# Altium PCB The-SIPM-(1).pcbdoc
Units mil, origin at the board's own origin, x right, y up, seen from the top; angles counter-clockwise.
Board outline 5890 x 5140 mil, 2 copper layers (Top Layer, Bottom Layer); 119 components, 59 nets, 365 pads, 99 vias.
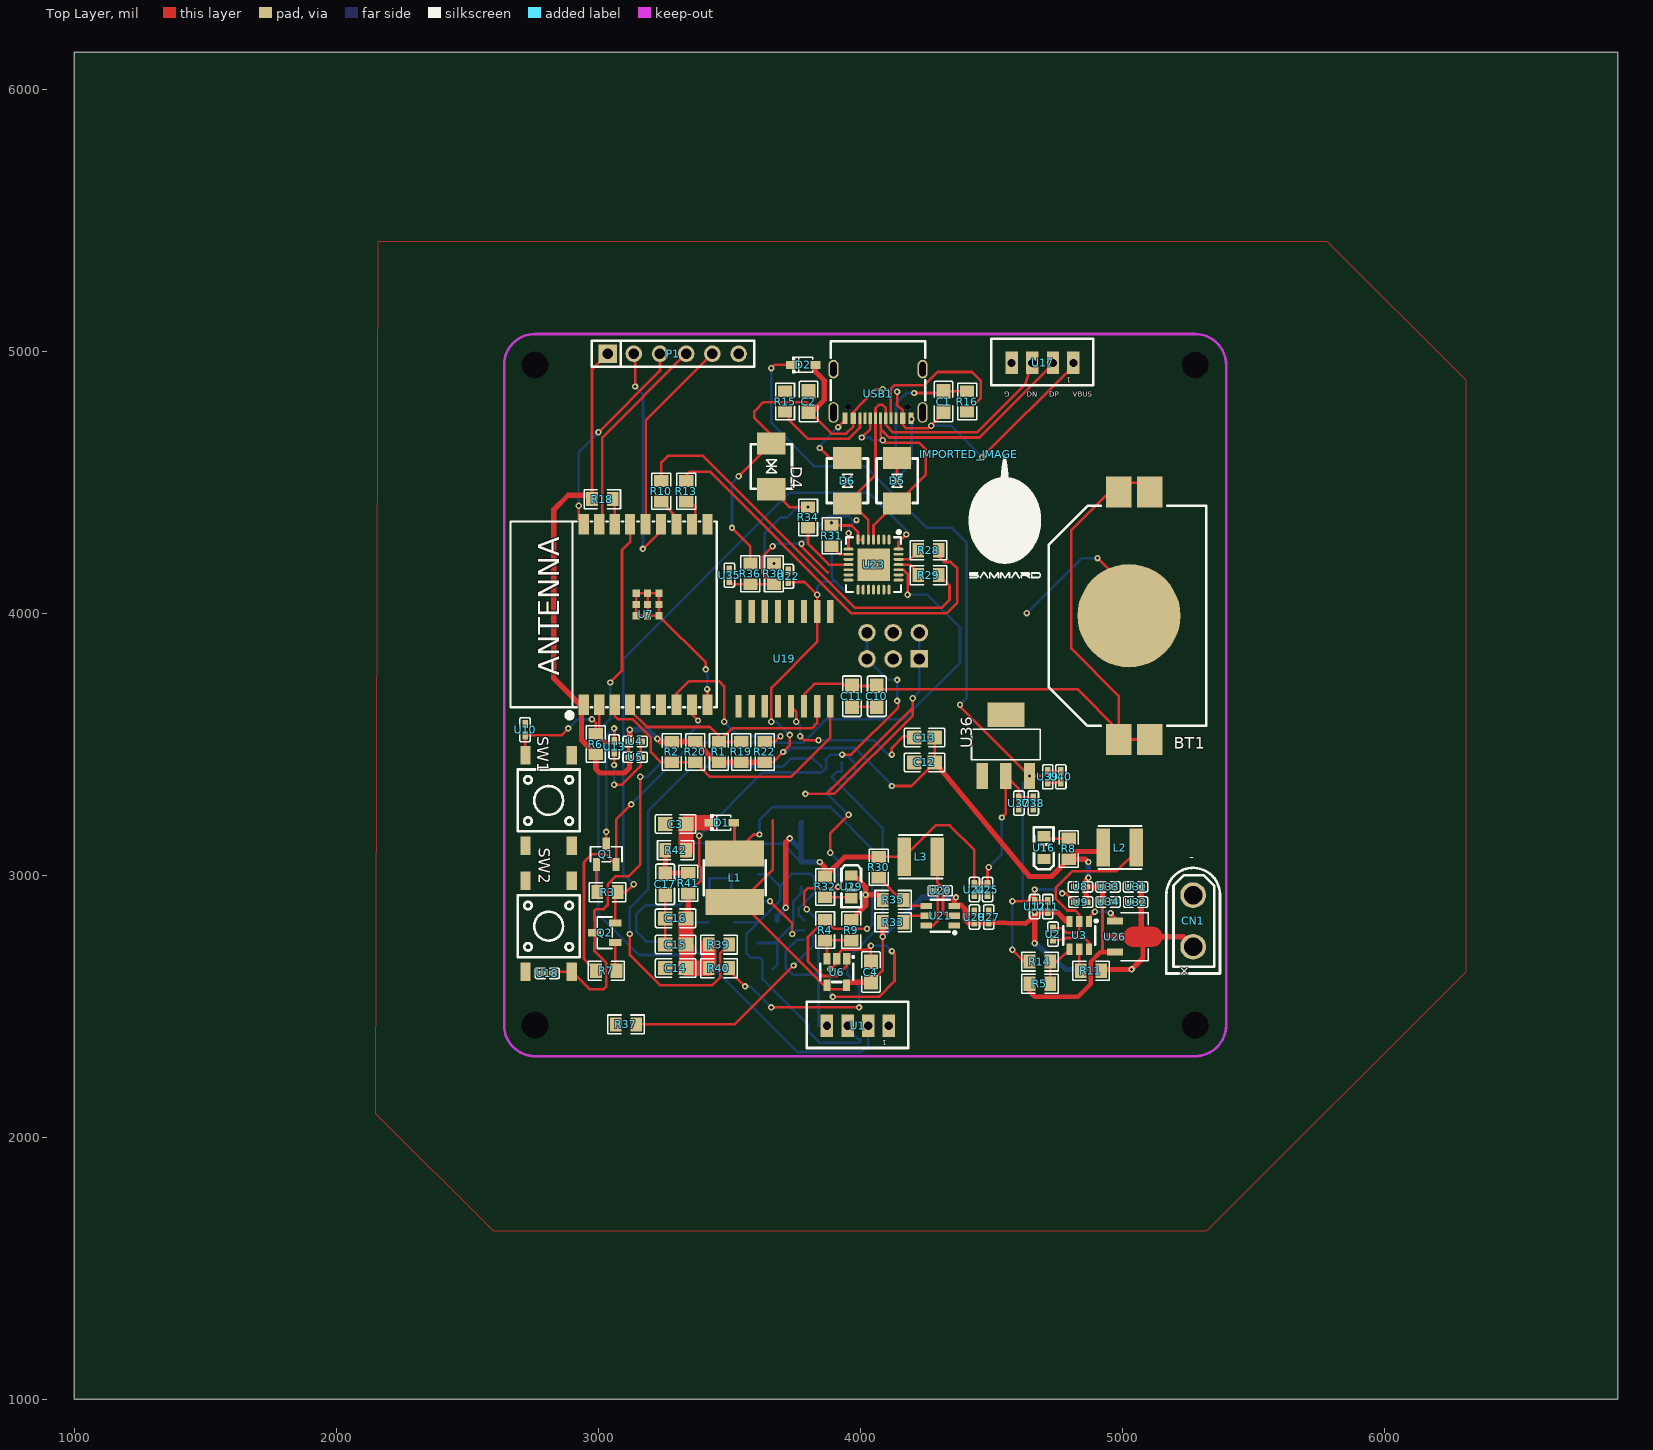
[diagram p0: Top Layer view]
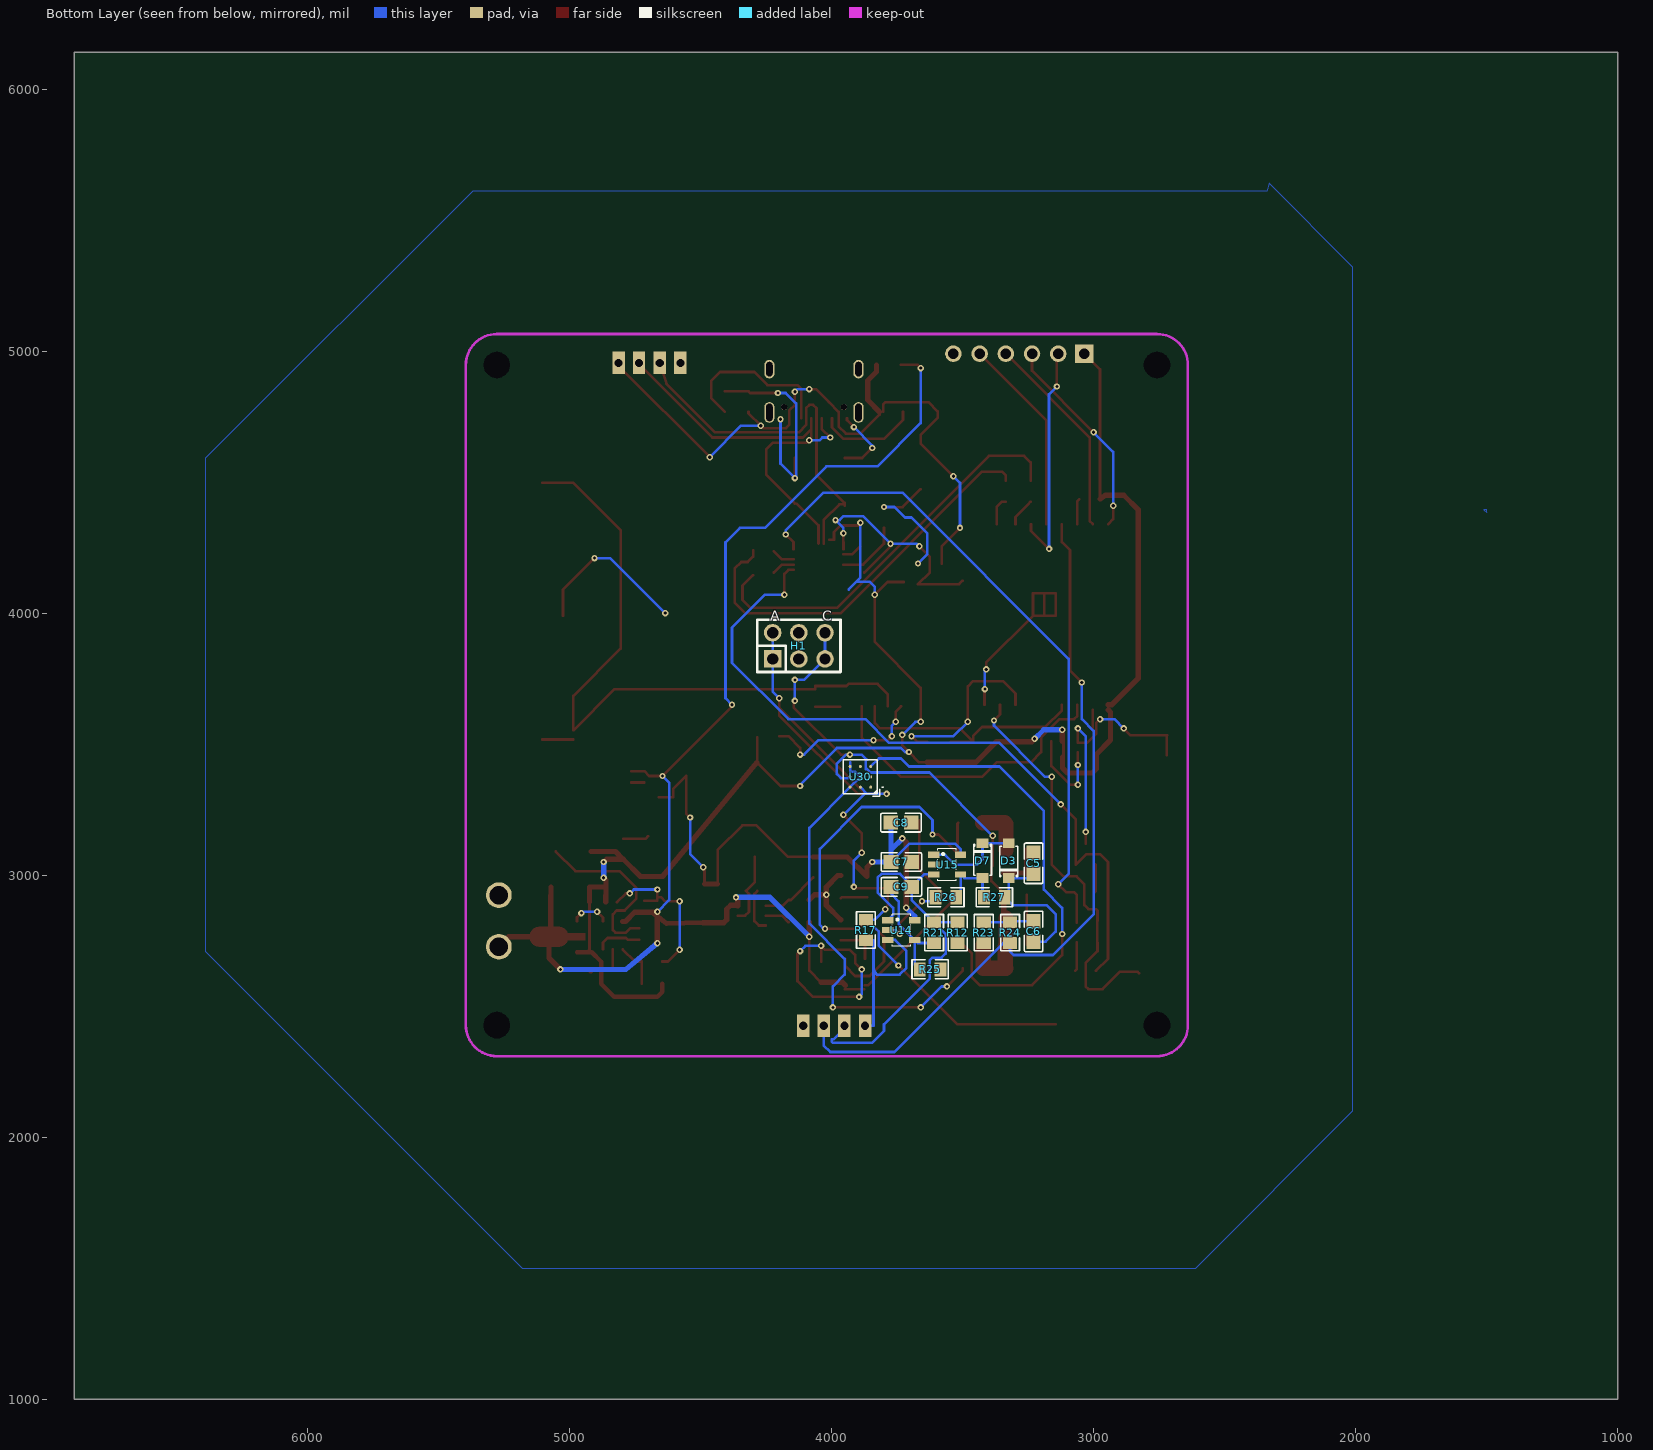
[diagram p1: Bottom Layer view, seen from below]

## Layer stack, top to bottom
Top Layer: signal copper (thickness not stored)
Dielectric: dielectric 12.6, FR-4, Dk 4.8
Bottom Layer: signal copper (thickness not stored)

## Board outline
6890,1000 1000,1000 1000,6140 6890,6140
cut-out: 2707.84,4946.89 cw(c2758.11,4947.16) 2808.39,4946.89 cw(c2758.11,4946.62) 2707.84,4946.89
cut-out: 2707.84,2427.21 cw(c2758.11,2427.48) 2808.39,2427.21 cw(c2758.11,2426.94) 2707.84,2427.21
cut-out: 5227.51,2427.21 cw(c5277.79,2427.48) 5328.06,2427.21 cw(c5277.79,2426.94) 5227.51,2427.21
cut-out: 5227.51,4946.89 cw(c5277.79,4947.16) 5328.06,4946.89 cw(c5277.79,4946.62) 5227.51,4946.89

## Components (designator, comment, footprint, x,y, rotation, side; value= is the part's Value field where it differs from the comment)
BT1 "CR2032" BAT-SMD_CR2032 5045,3990 r270 top
C1 "0.1uF" C0805#1 4317.25,4807.25 r90 top
C2 "10uF" C0805#1 3802.25,4807.25 r90 top
C3 "4.7uF" C0805#1 3295,3195 r180 top
C4 "2.2uF" C0805#1 4040,2630 r90 top
C5 "20nF" C0805#2 3228.89,3045.14 r270 bottom
C6 "20nF" C0805#2 3228.89,2785.14 r270 bottom
C7 "0.1uF" C0805#2 3733.89,3050.14 r0 bottom
C8 "10uF" C0805#2 3735,3200 r0 bottom
C9 "20nF" C0805#2 3733.89,2955.14 r0 bottom
C10 "0.1uF" C0805#1 4062.5,3682.5 r270 top
C11 "10uF" C0805#1 3967.5,3682.5 r270 top
C12 "0.1uF" C0805#1 4245,3430 r180 top
C13 "10uF" C0805#1 4245,3525 r180 top
C14 "0.1uF" C0805#1 3295,2645 r180 top
C15 "1uF" C0805#1 3295,2735 r180 top
C16 "10uF" C0805#1 3295,2835 r180 top
C17 "1uF" C0805#1 3255,2965 r270 top
CN1 "XT30UPB-M" CONN-TH_XT30UPB-M 5270,2825 r270 top
D1 "1N5819WS" SOD-323_L1.8-W1.3-LS2.5-RD 3470,3200 r0 top
D2 "LBAT54HT1G" SOD-323_L1.8-W1.3-LS2.5-RD 3782.25,4947.25 r0 top
D3 "1N5817W" SOD-123_L2.8-W1.8-LS3.7-RD 3323.89,3055.14 r270 bottom
D4 "SMBJ7.5CA-QH" DO-214AA_L4.4-W3.6-LS5.3-BI 3660,4560 r270 top
D5 "SMBJ7.5CA-QH" DO-214AA_L4.4-W3.6-LS5.3-BI 4140,4505 r90 top
D6 "SMBJ7.5CA-QH" DO-214AA_L4.4-W3.6-LS5.3-BI 3950,4505 r90 top
D7 "1N5817W" SOD-123_L2.8-W1.8-LS3.7-RD 3423.89,3055.14 r90 bottom
H1 "2×(4-1) Double female header" HDR-TH_6P-P2.54-V-F-R2-C3-S2.54-1 4125,3875 r0 bottom
IMPORTED_IMAGE "IMPORTED_IMAGE" IMPORTED_IMAGE 4413.43,4605.53 r0 top
L1 "10uH" IND-SMD_L6.0-W6.0_FNR60XXS 3520,2990 r270 top
L2 "2.2uH" IND-SMD_L4.0-W4.0_SMNR4012 4990,3105 r0 top
L3 "3.3uH" IND-SMD_L4.0-W4.0_SMNR4012 4230,3070 r0 top
P1 "SD card Reader" HDR-TH_6P-P2.54-V-F 3285,4990 r0 top
Q1 "L8050QLT1G" SOT-23-3_L2.9-W1.3-P1.90-LS2.4-BR 3030,3080 r270 top
Q2 "L8050QLT1G" SOT-23-3_L2.9-W1.3-P1.90-LS2.4-BR 3025,2780 r0 top
R1 "10k" R0805#1 3460,3470 r270 top
R2 "10k" R0805#1 3280,3470 r90 top
R3 "10K" R0805#1 3035,2935 r180 top
R4 "2k" R0805#1 3865,2790 r90 top
R5 "33.2k" R0805#1 4685,2585 r0 top
R6 "10K" R0805#1 2990,3500 r90 top
R7 "10K" R0805#1 3030,2635 r0 top
R8 "1k" R0805#1 4795,3100 r270 top
R9 "51k" R0805#1 3965,2790 r270 top
R10 "499" R0805#1 3240,4465 r90 top
R11 "10k" R0805#1 4880,2635 r0 top
R12 "0805" R0805#2 3518.89,2780.14 r90 bottom
R13 "499" R0805#1 3335,4465 r90 top
R14 "10k" R0805#1 4685,2670 r0 top
R15 "5.1k" R0805#1 3712.25,4807.25 r90 top
R16 "5.1k" R0805#1 4407.25,4807.25 r270 top
R17 "0805" R0805#2 3868.89,2790.14 r90 bottom
R18 "10k" R0805#1 3015,4435 r0 top
R19 "10K" R0805#1 3545,3470 r90 top
R20 "10K" R0805#1 3370,3470 r270 top
R21 "0805" R0805#2 3608.89,2780.14 r270 bottom
R22 "10k" R0805#1 3635,3470 r90 top
R23 "0805" R0805#2 3418.89,2780.14 r270 bottom
R24 "0805" R0805#2 3318.89,2780.14 r270 bottom
R25 "0805" R0805#2 3623.89,2640.14 r0 bottom
R26 "0805" R0805#2 3563.89,2915.14 r180 bottom
R27 "0805" R0805#2 3378.89,2915.14 r180 bottom
R28 "0Ω" R0805#1 4260,4240 r0 top
R29 "0Ω" R0805#1 4260,4145 r0 top
R30 "54.9k" R0805#1 4070,3030 r270 top
R31 "1k" R0805#1 3890,4295 r270 top
R32 "1k" R0805#1 3865,2955 r90 top
R33 "10k" R0805#1 4125,2820 r180 top
R34 "10k" R0805#1 3800,4365 r270 top
R35 "10k" R0805#1 4125,2905 r0 top
R36 "22.1K" R0805#1 3580,4150 r270 top
R37 "0805" R0805#1 3105,2430 r0 top
R38 "47.5K" R0805#1 3670,4150 r90 top
R39 "0Ω" R0805#1 3460,2735 r180 top
R40 "0Ω" R0805#1 3460,2645 r180 top
R41 "0805" R0805#1 3342.6,2968.91 r90 top
R42 "0805" R0805#1 3295,3095 r0 top
SW1 "SMD Tactile Switch6*6*6mm" SW-SMD_4P-L6.0-W6.0-P4.50-LS9.0_C23873 2810,3284.99 r270 top
SW2 "SMD Tactile Switch6*6*6mm" SW-SMD_4P-L6.0-W6.0-P4.50-LS9.0_C23873 2810,2804.99 r90 top
U1 "JST-PH_4-PIN_HEADER" JST_B4B-PH_HEADER 3990,2425 r0 top
U2 "0.1uF" C0402 4735,2775 r90 top
U3 "TPS563201DDCR" SOT-23-6_L2.9-W1.6-P0.95-LS2.8-BR 4835,2770 r90 top
U4 "10uF" C0402 3140,3510 r0 top
U5 "0.1uF" C0402 3140,3450 r0 top
U6 "MIC2288YD5-TR" TSOT-23-5_L2.9-W1.6-P0.95-LS2.8-BR 3910,2630 r90 top
U7 "ESP32-C3-WROOM-02-N4(4MB)" BULETM-SMD_ESPRESSIF_ESP32-C3-WROOM-02-N4-4MB 3180,3995 r90 top
U8 "22uF" C0402 4840,2955 r180 top
U9 "22uF" C0402 4840.59,2896.9 r180 top
U10 "0.1uF" C0402 2720,3555 r270 top
U11 "10uF" C0402 4715,2880 r90 top
U12 "1uF" C0402 4665,2880 r90 top
U13 "1uF" C0402 3060,3490 r270 top
U14 "OPA356AIDBVR" SOT-23-5_L3.0-W1.7-P0.95-LS2.8-BR 3733.89,2790.14 r180 bottom
U15 "OPA356AIDBVR" SOT-23-5_L3.0-W1.7-P0.95-LS2.8-BR 3558.89,3040.14 r180 bottom
U16 "0805 SF-RED" LED0805-RD_RED 4700,3105 r90 top
U17 "JST-PH_4-PIN_HEADER" JST_B4B-PH_HEADER 4695,4955 r0 top
U18 "0.1uF" C0402 2805,2625 r0 top
U19 "DS3231" SO16W 3710,3825 r180 top
U20 "0.1uF" C0402 4305,2940 r0 top
U21 "TPS563201DDCR" SOT-23-6_L2.9-W1.6-P0.95-LS2.8-BR 4305,2845 r0 top
U22 "10uF" C0402 3725,4140 r90 top
U23 "CP2102" QFN-28_L5.0-W5.0-P0.50-TL-EP3.2 4050,4185 r270 top
U24 "22uF" C0402 4435,2945 r270 top
U25 "22uF" C0402 4485,2945 r270 top
U26 "HT7833" SOT-89_L4.5-W2.5-P1.50-LS4.2-BR 5025,2765 r180 top
U27 "0.1uF" C0402 4490,2840 r90 top
U28 "10uF" C0402 4435,2840 r90 top
U29 "0805 SF-RED" LED0805-RD_RED 3965,2955 r270 top
U30 "Sipm2" SIPM_REVERSE 3890,3375 r270 bottom
U31 "10uF" C0402 5050,2955 r180 top
U32 "0.1uF" C0402 5050.59,2896.9 r180 top
U33 "10uF" C0402 4945,2955 r0 top
U34 "0.1uF" C0402 4945.59,2897.67 r0 top
U35 "1uF" C0402 3500,4145 r90 top
U36 "AMS117-5V" AMS117-TOPL 4555,3495 r90 top
U37 "0.1uF" C0402 4605,3275 r270 top
U38 "10uF" C0402 4660,3275 r270 top
U39 "10uF" C0402 4715,3375 r270 top
U40 "0.1uF" C0402 4765,3375 r270 top
USB1 "HX TYPE-C 16P 3MD 5A" TYPE-C-SMD_HX-TYPE-C-16P-3MD-5A 4067.25,4837.25 r180 top

## Footprints (in the part's own frame and the unit in brackets; to place one, negate y for a bottom-side part, rotate by r counter-clockwise, add the part's x,y. Pads: shape width x height; smd on the part's side, far side on the other; paste and mask are expansions set on the pad)
AMS117-TOPL [mm]
  rect 2.5x1.1 smd paste+0 mask+0.051: 1(-2.97,2.3) 2(-2.97,0) 3(-2.97,-2.3)
  rect 2.34x3.6 smd paste+0 mask+0.051: 4(2.97,0)
  silkscreen extent -1.37,-3.33 1.57,3.33
BAT-SMD_CR2032 [mm]
  round 10 smd paste-100 mask+0.05: 1(0,-0.508)
  rect 3x2.5 smd paste-100 mask+0.05: 2(-12,-1.5) 2(-12,1.5) 2(12,-1.5) 2(12,1.5)
  silkscreen extent -10.68,-8.3 10.68,7
BULETM-SMD_ESPRESSIF_ESP32-C3-WROOM-02-N4-4MB [mm]
  rect 2x1 smd paste+0 mask+0.05: 1(-8.75,6) 2(-8.75,4.5) 3(-8.75,3) 4(-8.75,1.5) 5(-8.75,0) 6(-8.75,-1.5) 7(-8.75,-3) 8(-8.75,-4.5) 9(-8.75,-6) 10(8.75,-6) 11(8.75,-4.5) 12(8.75,-3) 13(8.75,-1.5) 14(8.75,0) 15(8.75,1.5) 16(8.75,3) 17(8.75,4.5) 18(8.75,6)
  rect 0.7x0.7 smd paste+0 mask+0.05: 19(-0.14,0.9) 19(-0.14,-0.2) 19(-0.14,-1.3) 19(0.96,-1.3) 19(0.96,-0.2) 19(0.96,0.9) 19(2.06,-1.3) 19(2.06,-0.2) 19(2.06,0.9)
  silkscreen extent -10.03,-6.9 9,13.1
C0402 [mm]
  rect 0.79x0.54 smd paste-100 mask+0.051: 1(-0.545,0) 2(0.545,0)
  silkscreen extent -1.17,-0.5 1.17,0.5
C0805#1 [mm]
  rect 1.41x1.35 smd paste-100 mask+0.051: 1(-1,0) 2(1,0)
  silkscreen extent -1.96,-0.9 1.96,0.9
C0805#2 [mm]
  rect 1.41x1.35 smd paste-100 mask+0.051: 1(1,0) 2(-1,0)
  silkscreen extent -1.96,-0.9 1.96,0.9
CONN-TH_XT30UPB-M [mm]
  round 2.5 hole 1.8 paste+0 mask+0.051: 1(-2.5,0) 2(2.5,0)
  silkscreen extent -5.14,-2.6 5.1,2.6
DO-214AA_L4.4-W3.6-LS5.3-BI [mil]
  rect 85x108 smd paste+0 mask+2: 1(-87,0) 2(87,0)
  silkscreen extent -85,-79 85,79
HDR-TH_6P-P2.54-V-F [mm]
  rect 1.8x1.8 hole 1.02 paste+0 mask+0.051: 1(-6.35,0)
  round 1.6 hole 1.02 paste+0 mask+0.051: 2(-3.81,0) 3(-1.27,0) 4(1.27,0) 5(3.81,0) 6(6.35,0)
  silkscreen extent -7.87,-1.25 7.87,1.25
HDR-TH_6P-P2.54-V-F-R2-C3-S2.54-1 [mm]
  rect 1.7x1.7 hole 1.1 paste+0 mask+0.051: 1(2.54,1.27)
  round 1.7 hole 1.1 paste+0 mask+0.051: 2(2.54,-1.27) 3(0,1.27) 4(0,-1.27) 5(-2.54,1.27) 6(-2.54,-1.27)
  silkscreen extent -4.04,-2.54 4.04,2.54
IMPORTED_IMAGE [mil]
  silkscreen extent 0,-472 276,0
IND-SMD_L4.0-W4.0_SMNR4012 [mm]
  rect 1.3x3.7 smd paste+0 mask+0.051: 1(-1.6,0) 2(1.6,0)
  silkscreen extent -2.08,-2.09 2.12,2.11
IND-SMD_L6.0-W6.0_FNR60XXS [mm]
  rect 2.5x5.7 smd paste+0 mask+0.051: 1(-2.35,-0.013) 2(2.35,0.013)
  silkscreen extent -1.69,-3 1.69,3
JST_B4B-PH_HEADER [mil]
  rect 47.2x85 hole 31.4 paste+0 mask+2: P1(118,0) P2(40,0) P3(-39,0) P4(-118,0)
  silkscreen extent -195,-85 193,92
LED0805-RD_RED [mm]
  rect 1x1.25 smd paste+0 mask+0.051: 1(-1.1,0) 2(1.1,0)
  silkscreen extent -2.1,-0.95 1.98,0.96
QFN-28_L5.0-W5.0-P0.50-TL-EP3.2 [mm]
  oval 0.95x0.28 smd paste-100 mask+0.051: 1(-2.425,1.501) 2(-2.425,1.001) 3(-2.425,0.501) 4(-2.425,0) 5(-2.425,-0.5) 6(-2.425,-1.001) 7(-2.425,-1.501) 15(2.425,-1.501) 16(2.425,-1.001) 17(2.425,-0.5) 18(2.425,0) 19(2.425,0.501) 20(2.425,1.001) 21(2.425,1.501)
  oval 0.28x0.95 smd paste-100 mask+0.051: 8(-1.501,-2.425) 9(-1.001,-2.425) 10(-0.501,-2.425) 11(0,-2.425) 12(0.5,-2.425) 13(1.001,-2.425) 14(1.501,-2.425) 22(1.501,2.425) 23(1.001,2.425) 24(0.5,2.425) 25(0,2.425) 26(-0.501,2.425) 27(-1.001,2.425) 28(-1.501,2.425)
  rect 3.15x3.15 smd paste-100 mask+0.051: 29(0,0)
  silkscreen extent -3.3,-2.65 2.65,2.65
R0805#1 [mil]
  rect 44.59x54.21 smd paste-3937.01 mask+2: 1(-39.37,0) 2(39.37,0)
  silkscreen extent -69,-36 69,36
R0805#2 [mil]
  rect 44.59x54.21 smd paste-3937.01 mask+2: 1(39.37,0) 2(-39.37,0)
  silkscreen extent -69,-36 69,36
SIPM_REVERSE [mm]
  round 0.288 smd paste-100 mask+0.051: A1(-1,0) A2(1,0) C1(0,-1) C2(0,1) R1(-1,1) R2(1,1) ""(-1,-1) ""(0,0) ""(1,-1)
  silkscreen extent -1.65,-1.65 1.87,2.2
SO16W [mil]
  rect 23.6x86.6 smd paste+0 mask+2: 1(-175,-181) 2(-125,-181) 3(-75,-181) 4(-25,-181) 5(25,-181) 6(75,-181) 7(125,-181) 8(175,-181) 9(175,181) 10(125,181) 11(75,181) 12(25,181) 13(-25,181) 14(-75,181) 15(-125,181) 16(-175,181)
SOD-123_L2.8-W1.8-LS3.7-RD [mm]
  rect 0.95x1.15 smd paste+0 mask+0.051: 1(1.693,0) 2(-1.693,0)
  silkscreen extent -1.41,-0.87 1.58,0.87
SOD-323_L1.8-W1.3-LS2.5-RD [mm]
  rect 1x0.75 smd paste+0 mask+0.051: 1(-1.173,0) 2(1.173,0)
  silkscreen extent -1.08,-0.8 0.9,0.8
SOT-23-3_L2.9-W1.3-P1.90-LS2.4-BR [mm]
  rect 1.25x0.7 smd paste+0 mask+0.051: 1(1,-0.95) 2(1,0.95) 3(-1,0)
  silkscreen extent -0.73,-1.53 0.73,1.53
SOT-23-5_L3.0-W1.7-P0.95-LS2.8-BR [mm]
  rect 1.1x0.6 smd paste+0 mask+0.051: 1(-1.3,0.95) 2(-1.3,0) 3(-1.3,-0.95) 4(1.3,-0.95) 5(1.3,0.95)
  silkscreen extent -0.9,-1.55 0.9,1.55
SOT-23-6_L2.9-W1.6-P0.95-LS2.8-BR [mm]
  rect 1.1x0.6 smd paste+0 mask+0.051: 1(1.35,-0.95) 2(1.35,0) 3(1.35,0.95) 4(-1.35,0.95) 5(-1.35,0) 6(-1.35,-0.95)
  silkscreen extent -0.9,-1.78 1.52,1.55
SOT-89_L4.5-W2.5-P1.50-LS4.2-BR [mm]
  rect 1.575x0.672 smd paste+0 mask+0.051: 1(1.356,-1.5) 3(1.356,1.5)
  Top Layer region: -2.283,0.959 -0.429,0.959 -0.385,0.958 -0.34,0.955 -0.296,0.949 -0.252,0.942 -0.208,0.933 -0.165,0.921 -0.123,0.908 -0.081,0.893 -0.04,0.875 0,0.856 0.04,0.835 0.078,0.812 0.115,0.788 0.151,0.761 0.185,0.733 0.219,0.704 0.251,0.673 0.281,0.64 0.31,0.606 0.337,0.571 0.362,0.534 0.386,0.497 0.408,0.458 0.428,0.418 0.447,0.339 2.144,0.339 2.144,-0.321 0.447,-0.321 0.428,-0.401 0.408,-0.44 0.386,-0.479 0.362,-0.517 0.337,-0.553 0.31,-0.588 0.281,-0.622 0.251,-0.655 0.219,-0.686 0.185,-0.716 0.151,-0.744 0.115,-0.77 0.078,-0.795 0.04,-0.818 0,-0.839 -0.04,-0.858 -0.081,-0.875 -0.123,-0.89 -0.165,-0.904 -0.208,-0.915 -0.252,-0.925 -0.296,-0.932 -0.34,-0.937 -0.385,-0.94 -0.429,-0.941 -2.283,-0.941 -2.328,-0.94 -2.372,-0.937 -2.416,-0.932 -2.46,-0.925 -2.504,-0.915 -2.547,-0.904 -2.589,-0.89 -2.631,-0.875 -2.672,-0.858 -2.713,-0.839 -2.752,-0.818 -2.79,-0.795 -2.827,-0.77 -2.863,-0.744 -2.898,-0.716 -2.931,-0.686 -2.963,-0.655 -2.993,-0.622 -3.022,-0.588 -3.049,-0.553 -3.075,-0.517 -3.098,-0.479 -3.12,-0.44 -3.141,-0.401 -3.159,-0.36 -3.175,-0.318 -3.189,-0.276 -3.202,-0.233 -3.212,-0.19 -3.22,-0.146 -3.227,-0.102 -3.231,-0.058 -3.233,-0.013 -3.233,0.031 -3.231,0.076 -3.227,0.12 -3.22,0.164 -3.212,0.208 -3.202,0.251 -3.189,0.294 -3.175,0.336 -3.159,0.377 -3.141,0.418 -3.12,0.458 -3.098,0.497 -3.075,0.534 -3.049,0.571 -3.022,0.606 -2.993,0.64 -2.963,0.673 -2.931,0.704 -2.898,0.733 -2.863,0.761 -2.827,0.788 -2.79,0.812 -2.752,0.835 -2.713,0.856 -2.672,0.875 -2.631,0.893 -2.589,0.908 -2.547,0.921 -2.504,0.933 -2.46,0.942 -2.416,0.949 -2.372,0.955 -2.328,0.958
  silkscreen extent -1.87,-2.33 0.78,2.33
SW-SMD_4P-L6.0-W6.0-P4.50-LS9.0_C23873 [mm]
  rect 1.8x1 smd paste+0 mask+0.051: 1(-4.4,2.25) 2(4.4,2.25) 3(4.4,-2.25) 4(-4.4,-2.25)
  silkscreen extent -3,-3 3,3
TSOT-23-5_L2.9-W1.6-P0.95-LS2.8-BR [mm]
  rect 1.1x0.7 smd paste+0 mask+0.051: 1(1.294,-0.951) 2(1.294,-0.001) 3(1.294,0.951) 4(-1.294,0.951) 5(-1.294,-0.949)
  silkscreen extent -0.97,-1.65 1.52,1.61
TYPE-C-SMD_HX-TYPE-C-16P-3MD-5A [mm]
  oval 1x1.8 hole 0.6 slot 1.4 at 90 deg paste+0 mask+0.051: 1(-4.32,-2.384) 1(4.32,-2.384)
  oval 1x2 hole 0.6 slot 1.7 at 90 deg paste+0 mask+0.051: 1(-4.32,1.816) 1(4.32,1.816)
  rect 0.5x1.14 smd paste-100 mask+0.051: A1(-3.2,2.383) A4(-2.4,2.383) A9(2.4,2.383) A12(3.2,2.383)
  rect 0.3x1.14 smd paste-100 mask+0.051: A5(-1.25,2.383) A6(-0.25,2.383) A7(0.25,2.383) A8(1.25,2.384) B5(1.75,2.383) B6(0.75,2.383) B7(-0.75,2.383) B8(-1.75,2.384)
  round 0.6 hole 0.6 unplated paste+0: ""(-2.89,1.296) ""(2.89,1.296)
  silkscreen extent -4.57,-5.08 4.57,0.63

## Via types
v1: diameter 24.41, hole 12.2, Top Layer to Bottom Layer, tented both sides, 99 vias

## Nets (pads, with @x,y where several pads share a name; then routed paths per layer and width w, separated by ;. In a path a pad name is that pad's centre, name@x,y a point inside that pad or via, vN(x,y) a via of type N, cw(c..) or ccw(c..) an arc to the next point about the centre after c; other vN are vias at no path point)
3V3: C12.1 C13.1 L2.1 P1.1 R1.2 R2.2 R5.1 R6.1 R8.2 R18.1 R19.1 R20.1 R22.1 R31.1 U4.1 U5.1 U7.1 U8.1 U9.1 U19.2 U22.1 U23.6 U23.7 U26.3 U33.1 U34.1 | length 6911.6
  Top Layer w10: R18.1 2975.63,4930.63 P1.1 ; U5.1@3115,3455 U4.1@3115,3515 ; R22.1 3665.63,3430.63 v1(3705,3470) 3730,3495 v1(3730,3535) ; v1(3660,3585) 3660,3655 3660,3715 3835,3890 U19.2 v1(3835,4070) 3786.46,4118.54 U22.1 ; R31.1 3965.6,4334.4 3990.9,4309.1 U23.7 ; U23.7@3990,4280 U23.6@4007.8,4280 ; v1(4120,3340) 4194.38,3340 C12.1 C13.1 ; U34.1 4924.1,2715.9 4934.1,2705.9 U26.3
  Top Layer w17: R5.1 4645.63,2554.37 4665,2535 4830,2535 4880,2585 4880,2670 4915.94,2705.94 U26.3
  Top Layer w20: U7.1@2943.78,3630.51 2935,3621.73 2935,3515.63 R6.1 ; U7.1 2929.5,3650.5 2830,3750 2830,4395 2885,4450 2955,4450 R18.1 ; R6.1 2990,3405 3005,3390 3100,3390 3118.5,3408.5 U5.1 ; U4.1 3120,3511.46 v1(3120,3555) ; v1(3225,3520) 3235.63,3509.37 R2.2 R20.1 3448.74,3430.63 R1.2 R19.1 R22.1 ; C12.1 4644.4,2995 4730,2995 R8.2 ; U9.1@4862.05,2896.9 U8.1 ; v1(4870,2990) 4861.46,2981.46 U8.1 ; v1(4870,3050) 4859.37,3060.63 R8.2 4824.37,3090 L2.1@4916.9,3090 ; U34.1 U33.1 U8.1
  Bottom Layer w10: v1(3660,3585) 3680,3585 v1(3730,3535) ; v1@3710,3470 3720,3470 3735,3485 3980,3485 v1@4125,3340 ; v1(3835,4070) 3835,4100 3855,4120 3905,4120 3935,4090 3890,4135 v1(3890,4345)
  Bottom Layer w20: v1(3120,3555) 3190,3555 v1(3225,3520) ; v1(4870,2990) v1(4870,3050)
5V: C7.1 C8.1 L3.1 R30.1 R32.2 U14.5 U15.5 U24.1 U25.1 U36.2 U37.1 U38.1 | length 2517.3
  Top Layer w10: R30.1 L3.1 4287.01,3190 4340,3190 4435,3095 U24.1 ; U25.1 4485,3025 v1(4490,3030) ; v1(4540,3220) 4555,3235 U36.2 4605,3328.07 U37.1 U38.1
  Top Layer w20: v1(3715,2875) 3715,3125 v1(3730,3140) ; v1(3845,3050.14) 3865,3030.14 R32.2 3940,3069.37 R30.1 ; U24.1 U25.1
  Bottom Layer w10: U15.5 3507.7,3099 3528.9,3120.1 3703.3,3120.1 C7.1 ; v1(4490,3030) 4540,3080 v1(4540,3220)
  Bottom Layer w20: U14.5 3682.71,2842.71 v1(3715,2875) ; v1(3730,3140) 3773.27,3096.73 C7.1 ; C8.1 3773.26,3198.89 C7.1 ; v1(3845,3050.14) C7.1
33V: C3.1 D1.1 R42.2 | length 191.5
  Top Layer w59.05: R42.2 C3.1 ; C3.1 3339.4,3200 3384.6,3200 3386.9,3200 D1.1
C6_2: C6.2 R23.2 R24.2 | length 192.1
  Bottom Layer w10: C6.2 3313.89,2824.51 R24.2 R23.2
CHIP_PU: Q1.3 R6.2 SW1.4 U7.2 U10.2 U13.1 | length 1117
  Top Layer w10: SW1.4 2721.41,3532.12 U10.2 2858.54,3533.54 v1(2885,3560) ; v1(2975,3595) 2990,3580 R6.2 3002.83,3552.2 U7.2@3002.83,3630.51 ; R6.2 3024.4,3505 3060,3505 U13.1@3060,3521.5 ; Q1.3 v1(3030,3165) ; U13.1 v1(3060,3560)
  Bottom Layer w10: v1(2885,3560) 2920,3595 v1(2975,3595) ; v1(3030,3165) 3030,3530 v1(3060,3560)
CLK: P1.4 U7.17 | length 788.1
  Top Layer w10: U7.17 3015,4351.7 3015,4670 P1.4
CS: P1.2 U7.13 | length 882.6
  Top Layer w10: P1.2 3140,4985 v1(3140,4865) ; v1(3170,4245) 3239.05,4314.05 U7.13@3239.05,4339.49
  Bottom Layer w10: v1(3140,4865) 3170,4835 v1(3170,4245)
D3_1: C5.1 C6.1 D3.1 R27.1 | length 569.9
  Bottom Layer w10: C6.1 3183.3,2745.8 3145,2784 3145,2851.2 3178.9,2885.1 3309.5,2885.1 R27.1 ; C5.1 3246.16,2988.51 D3.1 3323.89,2930.77 R27.1
DTR: Q2.2 R3.1 U23.28 | length 2557.6
  Top Layer w10: Q2.2 3064.37,2925 R3.1 3105,2935 v1(3135,2965) ; U23.28 4145.47,4270.47 v1(4175,4300)
  Bottom Layer w10: v1(3135,2965) 3095,3005 3095,3825 3730,4460 4030,4460 4175,4315 v1(4175,4300)
GND: BT1.1 C1.2 C2.2 C3.2 C4.2 C5.2 C7.2 C8.2 C10.2 C11.2 C12.2 C13.2 C14.2 C15.2 C16.2 C17.2 CN1.1 D4.2 D5.2 D6.2 H1.3 H1.4 P1.6 R9.1 R12.2 R14.1 R15.2 R16.1 R23.1 R25.2 R26.2 R34.1 R35.1 R37.1 R38.2 SW1.1 SW2.1 U1.P1 U3.1 U4.2 U5.2 U6.2 U7.9 U7.19 U8.2 U9.2 U10.1 U11.2 U12.2 U13.2 U14.2 U15.2 U16.1 U17.P4 U18.1 U19.13 U21.1 U22.2 U23.3 U24.2 U25.2 U26.1 U27.2 U28.2 U29.1 U31.2 U32.2 U33.2 U34.2 U35.2 U36.1 U37.2 U38.2 U39.2 U40.2 USB1.A1 USB1.A12 | length 6890.3
  Top Layer w10: v1(3060,3345) 3090,3345 3161.46,3416.46 U5.2 U4.2 ; v1(3060,3420) U13.2 ; C17.2 C16.2 ; C15.2 C16.2 ; v1(3410,3785) 3410,3810.67 U7.19@3231.18,3989.49 ; v1(3415,3710) 3416.22,3708.78 U7.9 ; v1(3655,2900) 3740,2815 v1(3740,2775) ; D4.2 3728.63,4404.37 R34.1 ; U19.13 3755,3624 v1(3755,3585) ; v1(3770,3530) 3785,3515 v1(3840,3515) ; v1(3845,4630) 3883,4592 D6.2 ; v1(3885,2640) 3910.04,2665.04 U6.2 3910.04,2695.04 3930,2715 4025,2715 v1(4040,2730) C4.2 ; v1(3895,2535) 4070,2535 4130,2595 4130,2700 v1(4120,2710) ; v1(3915,4710) 3941.27,4736.27 USB1.A12 ; C11.2 C10.2 ; v1(4120,3460) 4120,3485 4165,3530 C13.2@4200.3,3530 ; v1(4140,4515) D5.2 ; v1(4205,4840) 4310.63,4840 C1.2 R16.1@4407.25,4846.62 ; v1(4580,2715) 4625,2670 R14.1 ; v1(4580,2900) 4635,2900 4650,2915 4665,2915 U12.2 ; v1(4665,2945) U12.2 U11.2 ; U39.2 U40.2 ; v1(4770,2930) 4785,2930 4818.1,2896.9 U9.2 ; U3.1@4872.4,2823.15 4872.4,2837.4 v1(4895,2860) ; v1(4905,4210) 5025.01,4089.99 BT1.1 ; v1(4955,2855) 4971.6,2838.4 U26.1 ; U7.19@3187.87,3989.49 U7.19@3231.18,3989.49 ; U7.19@3187.87,3989.49 3187.87,4032.79 U7.19@3187.87,4076.1 ; U7.19@3187.87,3989.49 3144.56,3989.49 3144.56,4032.79 3144.56,4076.1 U7.19@3187.87,4076.1 ; U7.19@3187.87,4076.1 3231.18,4076.1 3231.18,4032.79 U7.19@3231.18,3989.49
  Top Layer w20: R9.1 4020,2884.37 v1(4020,2925) ; U29.1 3976.69,2998.31 4020,2955 v1(4020,2925) ; R35.1 4065.63,2925 v1(4020,2925)
  Bottom Layer w10: v1(3060,3345) v1(3060,3420) ; v1(3410,3785) 3415,3780 v1(3415,3710) ; R26.2 3618.41,2900 v1(3655,2900) ; v1(3740,2775) 3755.14,2790.14 U14.2 ; v1(3755,3585) 3770,3570 v1(3770,3530) ; v1(3800,4405) 3760,4405 3720,4365 3695,4365 ; v1(3840,3515) 4050,3515 4105,3460 v1(4120,3460) ; v1(3845,4630) 3845,4640 v1(3915,4710) ; v1(3885,2640) 3885,2545 v1(3895,2535) ; v1(4040,2730) 4100,2730 v1(4120,2710) ; v1(4195,4740) 4195,4570 v1(4140,4515) 4135,4515 4135,4800 4175,4840 v1(4205,4840) ; v1(4580,2715) v1(4580,2900) ; v1(4635,4000) 4845,4210 v1(4905,4210) ; v1(4665,2945) 4755,2945 v1(4770,2930) ; v1(4895,2860) 4950,2860 v1(4955,2855) ; 3635,4224.4 v1(3670,4189.37) 3635,4224.4 ; 3635,4224.4 3635,4305 ; 3635,4224.4 3635,4305 ; 3635,4305 3695,4365 ; 3635,4305 3695,4365
GPIO2: R18.2 U7.16 | length 98.6
  Top Layer w10: R18.2 3061.89,4427.48 U7.16
GPIO8: R22.2 U7.7 | length 693.5
  Top Layer w10: U7.7 3298.11,3693.11 3345,3740 3460,3740 3480,3720 v1(3480,3585) ; R22.2 3674.37,3509.37 v1(3695,3530)
  Bottom Layer w10: v1(3480,3585) 3535,3530 v1(3695,3530)
GPIO9: Q2.3 SW2.4 U7.8 U18.2 | length 1566.9
  Top Layer w10: U18.2 2833.23,2631.77 SW2.4 2965.36,2565 3020,2565 3030,2575 3030,2665 2985,2710 Q2.3 2985,2865 2990,2870 3020,2870 3035,2885 3035,2965 3065,2995 3115,2995 3160,3040 v1(3160,3375) ; U7.8 3357.16,3612.84 v1(3380,3590)
  Bottom Layer w10: v1(3160,3375) 3185,3375 3380,3570 v1(3380,3590)
IN: R24.1 U1.P2 U7.15 | length 2929
  Top Layer w10: v1(3045,3735) 3090,3780 3090,4240 3120.94,4270.94 U7.15
  Bottom Layer w10: v1(3045,3735) 3045,3595 3000,3550 3000,2850 3155,2695 3305,2695 3318.9,2708.9 R24.1 3344.2,2740.8 3760,2325 4005,2325 4030,2350 U1.P2
MISO: P1.5 U7.14 | length 756.1
  Top Layer w10: U7.14 3180,4735 P1.5
MOSI: P1.3 U7.18 | length 786.7
  Top Layer w10: v1(2925,4410) 2925,4358.27 U7.18 ; v1(3000,4690) 3235,4925 P1.3
  Bottom Layer w10: v1(2925,4410) 2925,4615 v1(3000,4690)
Q1_1: Q1.1 R3.2 | length 106.9
  Top Layer w10: Q1.1 2992.6,2938.03 R3.2
Q2_1: Q2.1 R7.2 | length 109.7
  Top Layer w10: Q2.1 3064.37,2640 R7.2
R1: R39.1 U30.R1 | length 1879.4
  Top Layer w10: v1(3120,2775) 3120,2695 3235,2580 3435,2580 3465,2610 3465,2700.63 R39.1
  Bottom Layer w10: v1(3120,2775) 3120,2875 3190,2945 3190,3245 3359.4,3414.4 3704.4,3414.4 3735,3445 3820,3445 U30.R1
R3: R40.1 U30. | length 1681.9
  Top Layer w10: R40.1 3499.37,2635.63 v1(3560,2575) ; v1(3660,2495) v1(3995,2495)
  Bottom Layer w10: v1(3560,2575) 3580,2575 v1(3660,2495) ; 3929.4,3430.6 3929.4,3395 3910,3395 3890,3375 3929.37,3335.63 4085,3180 4085,2815 3950,2680 3950,2620 3995,2575 v1(3995,2495)
R8_1: R8.1 U16.2 | length 98.7
  Top Layer w10: U16.2 4708.94,3139.37 R8.1
R30_2: R30.2 R35.2 U21.4 | length 226.7
  Top Layer w10: R30.2 4155.63,2905 R35.2 4186.97,2882.4 U21.4@4251.85,2882.4
R32_1: R32.1 U29.2 | length 101.6
  Top Layer w10: R32.1 3961.06,2915.63 U29.2
R33_1: R33.1 U21.5 | length 97.8
  Top Layer w10: R33.1 4189.37,2845 U21.5@4251.85,2845
R41_2: C17.1 R41.2 R42.1 | length 179.9
  Top Layer w20: R42.1 C17.1 3258.91,3008.28 R41.2
RTS: Q1.2 R7.1 U23.24 | length 2824.6
  Top Layer w10: R7.1 2945,2680.63 2945,3050 2975,3080 3028.03,3080 Q1.2 3067.4,3212.4 v1(3125,3270) ; U23.24 4164.7,4165.3 4180,4150 v1(4180,4070)
  Bottom Layer w10: v1(3125,3270) 3360,3505 3780,3505 3870,3595 4165,3595 4380,3810 4380,3945 4255,4070 v1(4180,4070)
RX_UB: R13.2 R28.2 | length 1561.3
  Top Layer w10: R13.2@3335,4520 R13.2 3335,4525 3350,4540 3425,4540 3965,4000 4330,4000 4370,4040 4370,4169.4 4344.4,4195 4320,4195 4299.37,4215.63 R28.2
SCL: R2.1 R20.2 U7.3 U19.16 | length 1175.4
  Top Layer w10: U7.3 3061.9,3608.1 3075,3595 3130,3595 3200,3525 3200,3470 3239.4,3430.6 R2.1 ; R2.1 R20.2 ; R20.2 3425.6,3375 3735,3375 3885,3525 U19.16
SDA: R1.1 R19.2 U7.4 U19.15 | length 975.4
  Top Layer w10: U7.4 3120.9,3629.1 3185,3565 3425,3565 3460,3530 R1.1 3510.6,3560 3815,3560 3835,3580 U19.15 ; R1.1 R19.2
SIPM_A: H1.1 H1.2 R17.1 R37.2 U30.A2 | length 3413.9
  Top Layer w10: R37.2 3520,2430 v1(3745,2655) ; 3785,2905 3785,2935 ; v1(3790,3310) 3900,3310 4200,3610 v1(4200,3675) 4200,3640 3870,3310 3830,3310 ; v1(3795,2870) 3795,2875 3785,2885 3785,2935 ; v1(3885,3085) 3885,3160 v1(3955,3230) ; 3785,2935 3800,2950 ; 3785,2935 3800,2950 ; 3800,2950 v1@3910,2950 ; 3800,2950 v1@3910,2950 ; v1@3910,2950 v1(3915,2955) v1@3910,2950
  Bottom Layer w10: v1(3745,2655) 3820,2730 3820,2785 R17.1 3835.48,2829.52 v1(3795,2870) ; v1(3885,3085) 3915,3055 v1(3915,2955) ; U30.A2 3864.37,3310 v1(3790,3310) 3875,3310 v1(3955,3230) ; v1(4200,3675) 4225,3700 H1.1 H1.2
SIPM_C: C14.1 C15.1 C16.1 H1.5 H1.6 R39.2 R40.2 R41.1 U30.C1 | length 2221.8
  Top Layer w10: R41.1 3390,2976.94 3390,3030 3385,3035 v1(3385,3150) ; v1(3930,3460) 3965,3460 4145,3640 v1@4145,3671.2
  Top Layer w20: C16.1 3342.6,2843.23 R41.1
  Top Layer w59.05: C16.1 3334.37,2729.48 3336.97,2726.88 3336.97,2647.6 C14.1 R40.2 R39.2
  Bottom Layer w10: v1(3385,3150) 3626.69,3391.69 3851.69,3391.69 3865,3405 3870,3405 3870,3435 3865,3440 3885,3460 v1(3930,3460) 3945,3460 3980,3425 3980,3385 3965,3370 3934.4,3370 U30.C1 ; H1.6 H1.5 4105,3745 v1(4140,3745) v1(4140,3665)
SW1: L2.2 U2.2 U3.2 | length 691.9
  Top Layer w10: U2.2 4768.54,2796.46 4785,2780 4825,2780 4835,2790 U3.2@4835,2823.15 ; U3.2@4835,2823.1 4835,2850 4820,2865 4790,2865 4745,2910 4745,2950 4810,3015 4978,3015 L2.2@5053,3090
SW2: L3.2 U20.2 U21.2 | length 278
  Top Layer w10: L3.2 4292.99,2973.47 U20.2 4315,2928.54 4315,2860 4330,2845 U21.2@4358.15,2845
TX_UB: R10.2 R29.2 | length 1545.4
  Top Layer w10: R10.2 3240,4575 3265,4600 3400,4600 3980,4020 4310,4020 4340,4050 4340,4104.4 R29.2
U3_4: R5.2 R14.2 U3.4 | length 177.6
  Top Layer w10: R5.2 R14.2 4750.75,2670 U3.4@4797.6,2716.85
U3_5: R11.1 U3.5 | length 84.2
  Top Layer w10: U3.5@4835,2716.85 4835,2640.63 R11.1
U3_6: U2.1 U3.6 | length 173
  Top Layer w10: U2.1 4778.54,2753.54 4785,2760 4855,2760 4872.4,2742.6 U3.6@4872.4,2716.85
U6_1: D1.2 L1.1 R4.2 U6.1 | length 1707.3
  Top Layer w10: D1.2 3519.5,3196.66 L1.1 3591.98,3155 v1(3615,3155) ; R4.2 3899.37,2795 v1(4025,2795) ; R4.2 3800,2764.4 3800,2670 3855,2615 3910,2615 3947.4,2652.4 U6.1
  Bottom Layer w10: v1(3615,3155) 3615,3210 3665,3260 3885,3260 4045,3100 4045,2810 4030,2795 v1(4025,2795)
U6_3: R4.1 R9.2 U6.3 | length 172.8
  Top Layer w10: U6.3 3872.56,2743.07 R4.1 R9.2
U7_11: R13.1 U7.11 | length 109
  Top Layer w10: R13.1 3349.4,4425.6 3370,4405 U7.11@3370,4339.5
U7_12: R10.1 U7.12 | length 110
  Top Layer w10: R10.1 3250,4415 3298.1,4366.9 U7.12
U14_1: C9.2 R12.1 R21.2 U1.P3 U14.1 U15.3 | length 1582.7
  Bottom Layer w10: R12.1 R21.2 ; U15.3 3646.93,3002.74 C9.2 3694.52,2905.14 R21.2 ; C9.2 3694.5,2960.8 3738.9,3005.1 3808.9,3005.1 3823.9,2990.1 3823.9,2933.9 3765,2875 3765,2847.6 U14.1 ; U1.P3@3951,2419 U1.P3 3951,2414 3991.53,2373.47 4000,2373.47 4000,2365 3995,2360 3845,2360 3800,2405 3800,2430 3625,2605 3625,2675 3615,2685 3580,2685 3565,2700 3565,2775.6 R21.2
U14_3: R17.2 U1.P4 U14.3 | length 687.2
  Bottom Layer w10: U14.3 3757.7,2752.7 3715,2710 3715,2645 3740,2620 3827.4,2620 3840,2641.5 ; R17.2 3840,2750.8 3840,2425 U1.P4
U14_4: C9.1 R21.1 R25.1 U14.4 | length 439.3
  Bottom Layer w10: R21.1 3670.74,2740.77 U14.4 ; R25.1 3682.71,2659.59 U14.4 ; C9.1 3773.26,2929.51 3743.89,2900.14 3743.89,2813.93 U14.4
U15_1: D3.2 D7.1 U15.1 | length 371.1
  Bottom Layer w10: D3.2 D7.1 3423.9,3061.1 3444.9,3040.1 3528.9,3040.1 3566.3,3077.5 U15.1
U15_4: D7.2 R26.1 R27.2 U15.4 | length 260
  Bottom Layer w10: R27.2 3423.89,2920.77 D7.2 3493.48,2988.51 U15.4 3507.71,2931.96 R26.1
U20_1: U20.1 U21.6 | length 170.1
  Top Layer w10: U21.6@4251.85,2807.6 4277.6,2807.6 4295,2825 4295,2928.54 U20.1
U23_8: R36.2 R38.1 U23.8 U35.1 | length 1003.5
  Top Layer w10: U35.1 3512.91,4110.63 R36.2 R38.1 3625,4155.63 3625,4180 3625,4215 v1(3665,4255) ; v1(3775,4265) 3775,4255 3875,4155 ; U23.8 v1(3955,4305)
  Bottom Layer w10: v1(3665,4255) 3675,4265 v1(3775,4265) 3880,4370 3955,4370 3970,4355 v1(3985,4355) 3955,4325 v1(3955,4305)
U23_9: R31.2 U23.9 | length 77.5
  Top Layer w10: R31.2 3921.22,4224.4 U23.9
U23_11: R34.2 U23.11 | length 248.3
  Top Layer w10: R34.2 3800,4265 3880,4185 U23.11
U23_25: R29.1 U23.25 | length 87.6
  Top Layer w10: U23.25@4145,4185 4190.15,4185 R29.1@4220.15,4154.99
U23_26: R28.1 U23.26 | length 87.8
  Top Layer w10: U23.26@4145,4205 4189.5,4205 R28.1@4220.13,4235.63
USB1_A5: R16.2 USB1.A5 | length 636.3
  Top Layer w10: USB1.A5 4116.5,4856.5 4130,4870 4245,4870 4295,4920 4425,4920 4460,4885 4460,4820.6 R16.2
USB1_B5: R15.1 USB1.B5 | length 384.6
  Top Layer w10: R15.1@3727.3,4767.9 3727.3,4737.2 3799.5,4665 3955,4665 3998.3,4708.4 USB1.B5@3998.3,4743.4
USB_DN: D6.1 U17.P3 U23.5 USB1.A7 USB1.B7 | length 1431.5
  Top Layer w10: D6.1@3950,4415 3970,4415 4030,4355 U23.5@4030,4265.5 ; D6.1@3950,4420 4057.4,4527.4 USB1.A7@4057.4,4745.4 ; D6.1@3950.1,4409.9 D6.1@3950.1,4418 ; USB1.A7 4057.4,4782.4 4070,4795 4085,4795 4096.8,4783.2 USB1.B7 4096.8,4718.2 4125,4690 4445,4690 4630,4875 U17.P3
USB_DP: D5.1 U17.P2 U23.4 USB1.A6 USB1.B6 | length 1640.6
  Top Layer w10: v1(4005,4670) 4037.72,4702.72 USB1.B6 ; U23.4@4050,4265.5 4050,4335 D5.1@4133,4418 ; 4077.1,4702.9 4110,4670 4455,4670 U17.P2@4715,4930 ; USB1.A6 4077.09,4660 v1(4085,4660) 4095,4650 4225,4650 4250,4625 4250,4528 D5.1
  Bottom Layer w10: v1(4005,4670) 4035,4670 4045,4660 v1(4085,4660)
VBAT: BT1.2 C10.1 C11.1 U19.14 | length 2674.9
  Top Layer w10: U19.14 3785,3690 3825,3730 3935,3730 3943.13,3721.87 C11.1 C10.1 ; C10.1 4062.5,3710 4828.5,3710 BT1.2@4985.9,3552.6 ; BT1.2@4985.95,3517.56 BT1.2@5104.06,3517.56 ; BT1.2@4985.94,3552.56 4985.94,3684.05 4805,3865 4805,4316.49 4985.94,4497.44 BT1.2@5104.06,4497.44
VBUS: C1.1 C2.1 D2.2 D4.1 R36.1 U17.P1 USB1.A4 USB1.A9 | length 2711.5
  Top Layer w10: v1(3510,4325) 3580,4255 R36.1 ; v1@3535,4520 v1(3535,4522) D4.1 3660,4680 3595,4745 3595,4770 3630,4805 3795,4805 3802.3,4797.7 C2.1 ; C2.1@3817.3,4767.9 3817.3,4757.2 3889.5,4685 3945,4685 3972.8,4712.8 USB1.A9 ; USB1.A9 3972.76,4767.76 4010,4805 4060,4855 v1(4085,4855) ; v1(4140,4845) 4140,4795 4161.7,4773.3 USB1.A4 4161.7,4718.3 4174,4706 4261,4706 v1(4270,4715) 4317.25,4762.25 C1.1 ; v1(4465,4595) 4813,4943 U17.P1
  Top Layer w20: C2.1@3817.25,4767.88 3862.25,4812.88 3862.25,4887.25 3828.42,4921.08 D2.2
  Bottom Layer w10: v1(3510,4325) 3510,4497 v1(3535,4522) ; v1(4085,4855) 4130,4855 v1(4140,4845) ; v1(4270,4715) 4345,4715 v1(4465,4595)
VIN: C4.1 CN1.2 D2.1 L1.2 R11.2 R33.2 U3.3 U6.4 U6.5 U11.1 U12.1 U21.3 U27.1 U28.1 U31.1 U32.1 U36.3 U39.1 U40.1 | length 6305.4
  Top Layer w10: v1(3660,4935) 3672.25,4947.25 D2.1 ; 3665,3210 3665,3020 L1.2@3542.5,2897.5 ; U6.4 3860.9,2579.1 L1.2@3542.5,2897.5 ; U6.4@3875,2565 U6.5@3949.8,2565 ; C4.1 4085,2635.63 v1(4085,2765) ; v1(4380,3650) 4380,3643.62 v1(4645.55,3378.07) 4696.61,3378.07 U39.1 U40.1 ; L1.2@3542.5,2897.5 L1.2 L1.2@3542.5,2897.5
  Top Layer w19.68: U31.1 U32.1@5072.05,2896.9
  Top Layer w19.84: U27.1 4630,2815 4685,2858.5 ; 5078.4,2764.66 5231.91,2764.66 CN1.2
  Top Layer w20: U6.5 3958.94,2590.63 C4.1 ; v1(4085,2765) 4085,2819.37 R33.2 ; v1(4365,2915) 4358.15,2908.15 4358.15,2882.4 4360.75,2885 4385,2885 4400,2870 4400,2830 4411.46,2818.54 U28.1 U27.1 ; v1@4665,2741.46 v1(4665,2860) ; U12.1 4685,2858.54 4735,2858.54 4751.46,2858.54 4786.85,2823.15 U3.3@4797.6,2823.15 ; R11.2 4924.37,2640 v1(5035,2640) 5078.39,2683.4 5078.39,2764.66 5072.05,2771.01 U32.1@5072.05,2896.9
  Bottom Layer w10: v1(3660,4935) 3660,4725 3825,4560 4020,4560 4255,4325 4350,4325 4405,4270 4405,3675 v1(4380,3650) ; v1(4645.55,3378.07) 4620,3352.5 4620,2905 v1(4665,2860)
  Bottom Layer w20: v1(4085,2765) 4235,2915 v1(4365,2915) ; v1(4665,2740) 4785,2640 v1(5035,2640)
pads on no net: SW1.2 SW1.3 SW2.2 SW2.3 U7.5 U7.6 U7.10 U19.1 U19.3 U19.4 U19.5 U19.6 U19.7 U19.8 U19.9 U19.10 U19.11 U19.12 U23.1 U23.2 U23.10 U23.12 U23.13 U23.14 U23.15 U23.16 U23.17 U23.18 U23.19 U23.20 U23.21 U23.22 U23.23 U23.27 U23.29 U30.A1 U30.C2 U30.R2 U36.4 USB1. USB1.1 USB1.A8 USB1.B8

## Polygon pours and split planes (outlines as drawn)
GND on Top Layer (solid): 2160,5420 5780,5420 6310,4890 6310,2630 5320,1640 2600,1640 2150,2090
GND on Bottom Layer (solid): 1500,4385 1500,4395 1510,4395 1500,4385
GND on Bottom Layer (solid): 2340,5610 5370,5610 6390,4590 6390,2710 5180,1500 2610,1500 2010,2100 2010,5320 2330,5640

## Keep-outs
Keep-Out Layer:
  lines w10: 2640,2427.21 ccw(c2758.11,2427.21) 2758.11,2309.1 ; 2640,4946.89 cw(c2758.11,4946.89) 2758.11,5065 ; 5277.79,2309.1 ccw(c5277.79,2427.21) 5395.9,2427.21 ; 5277.79,5065 cw(c5277.79,4946.89) 5395.9,4946.89

## Silkscreen, mask and mechanical layers (free items; w line width, h text height)
Top Overlay:
  text "G" at 4570,4844.84 h19.68 r180
  text "DN" at 4635,4825.16 h19.68
  text "DP" at 4720,4825.16 h19.68
  text "VBUS" at 4810,4825.16 h19.68
Bottom Overlay:
  text "C" at 4035,3970.32 h39.37
  text "A" at 4235,3970.32 h39.37

## Text inside footprints (layer, text, board x,y; h text height)
CN1: Top Overlay "-" at 5255,3050.32 h39.37; Top Overlay "+" at 5263.92,2628.92 h39.37 r135
U1: Top Overlay "1" at 4100,2369 h20 r180
U7: Top Overlay "ANTENNA" at 2850,3760 h80 r90
U17: Top Overlay "1" at 4805,4899 h20 r180